# Altium PCB System.PcbDoc
Units mm, origin at the board's own origin, x right, y up, seen from the top; angles counter-clockwise.
Board outline 85 x 56 mm, 4 copper layers (Top Layer, POWER, GND, Bottom Layer), stack 0.778 mm thick; 9 components, 0 nets, 273 pads, 18 vias.
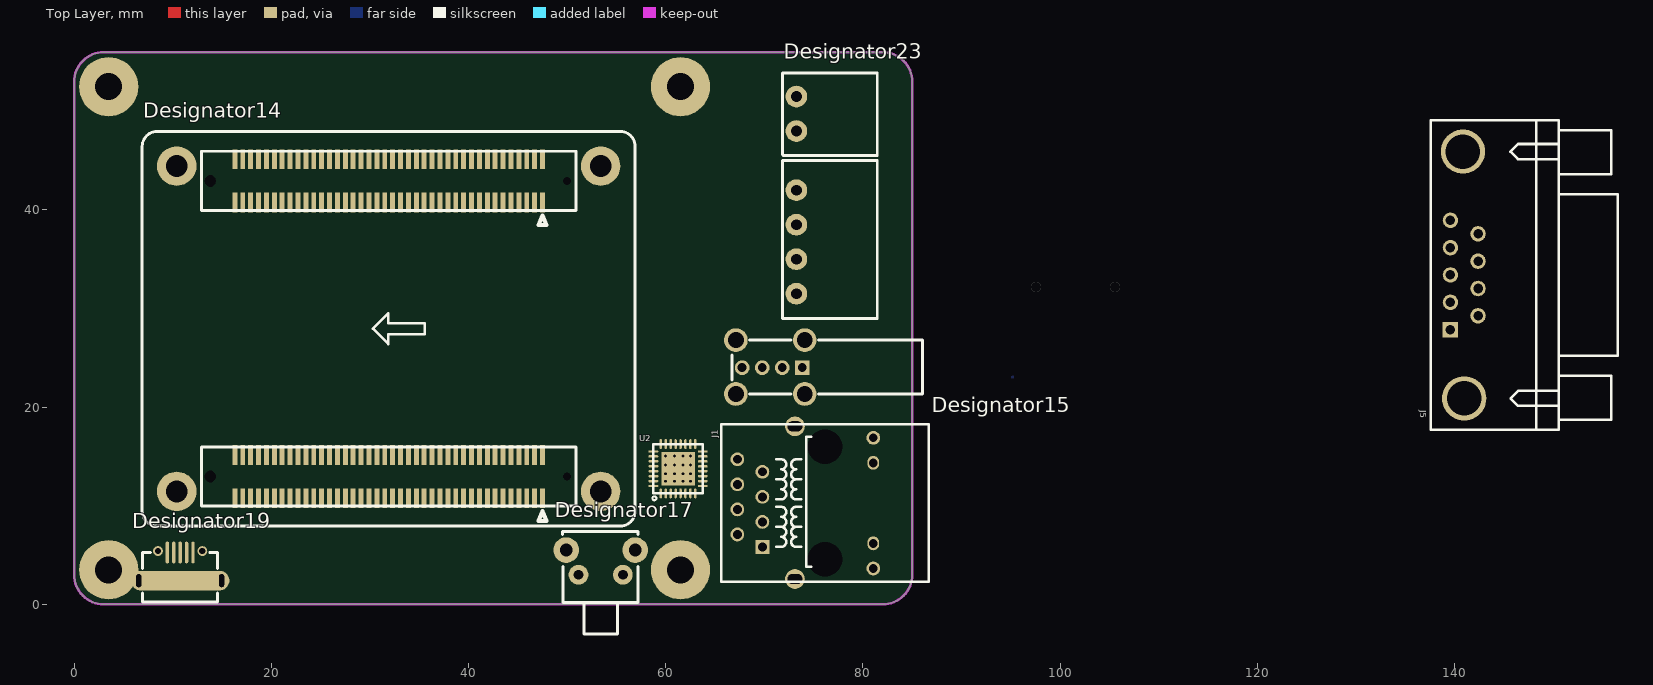
[diagram p0: Top Layer view]
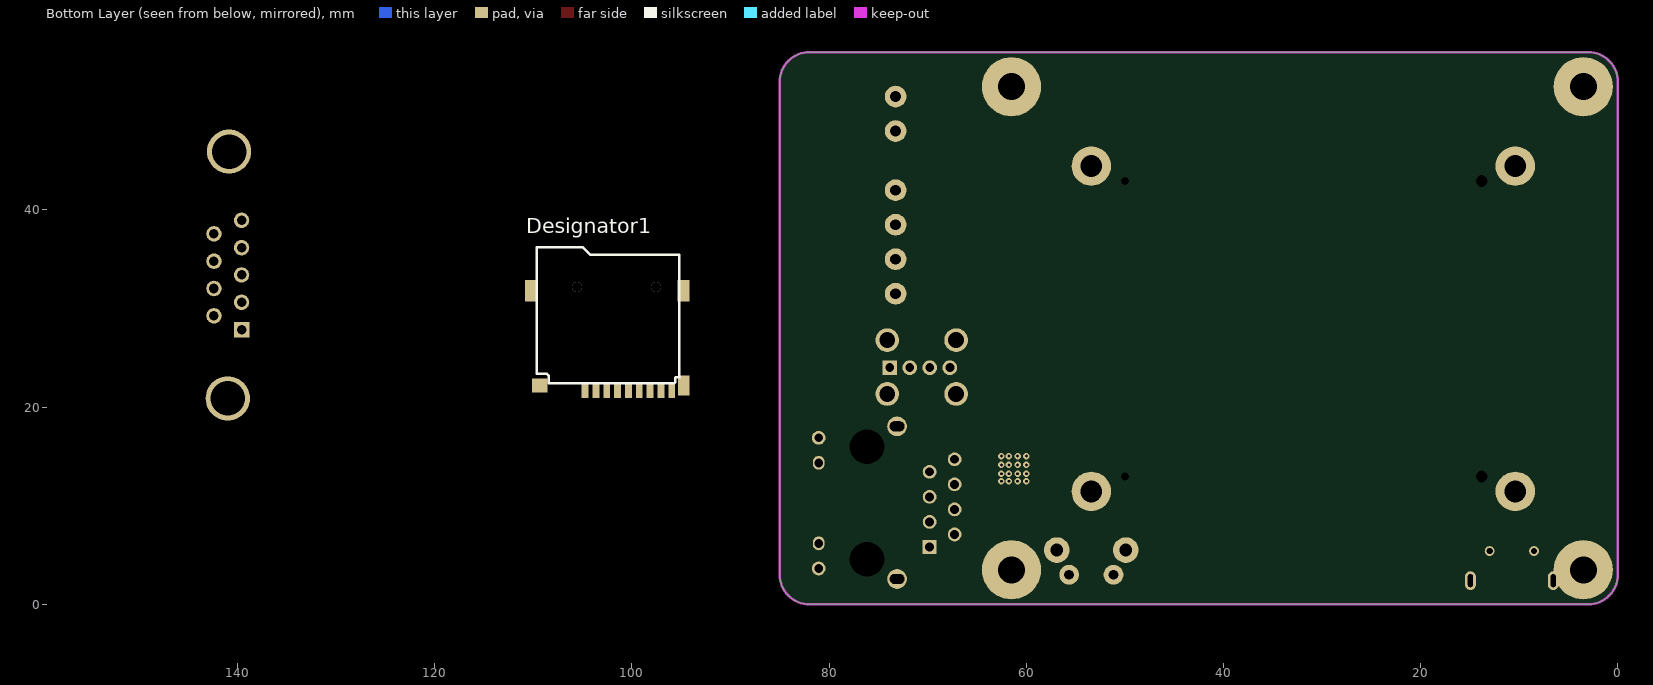
[diagram p1: Bottom Layer view, seen from below]

## Layer stack, top to bottom
Top Solder: solder mask 0.0102, Solder Resist, Dk 3.5
Top Layer: signal copper 0.0356
Dielectric 1: core 0.254, FR-4, Dk 4.2
POWER: signal copper 0.036
Dielectric 3: prepreg 0.127, Dk 4.2
GND: signal copper 0.036
Dielectric 2: core 0.254, Dk 4.2
Bottom Layer: signal copper 0.0356
Bottom Solder: solder mask 0.0102, Solder Resist, Dk 3.5

## Board outline
0,3 0,53 cw(c3,53) 3,56 82,56 cw(c82,53) 85,53 85,3 cw(c82,3) 82,0 3,0 cw(c3,3)

## Design rules (kind name [scope] priority, off if disabled: settings)
Clearance [All] p1: gap=0.254
PolygonConnect [All] p1: connectstyle=Relief reliefconductorwidth=0.254 reliefentries=4 polygonreliefangle="90 Angle" airgapwidth=0.254
RoutingVias [All] p1: holewidth=0.711 width=1.27 viastyle="Through Hole" minholewidth=0.711 minwidth=1.27 maxholewidth=0.711 maxwidth=1.27
SolderMaskExpansion [All] p1: expansion=0.102
Width [All] p1: maxlimit=0.254 minlimit=0.254 preferedwidth=0.254
29 further rules are at their usual default settings.

## Components (designator, comment, footprint, x,y, rotation, side; value= is the part's Value field where it differs from the comment)
Designator1 "Comment" TF 102.5,26.75 r90 bottom
Designator14 "Comment" i.MX6_PCB 47.5,10.75 r90 top
Designator15 "Comment" USB-C 67.75,24 r0 top
Designator17 "Comment" SW4 53.4,3 r0 top
Designator19 "Comment" MICRO_USB 10.75,0.254 r0 top
Designator23 "Comment" WJ15EDGRM 73.25,31.5 r90 top
J1 "HR911105A" RJ-45A12 81.05,3.64 r0 top
J5 "DB9_MALE" DB9R/M 139.586,27.864 r90 top
U2 "KSZ8081" QFN-32 61.25,13.75 r0 top

## Footprints (in the part's own frame and the unit in brackets; to place one, negate y for a bottom-side part, rotate by r counter-clockwise, add the part's x,y. Pads: shape width x height; smd on the part's side, far side on the other; paste and mask are expansions set on the pad)
DB9R/M [mil]
  rect 62x62 hole 38: 1(0,0)
  round 62 hole 38: 2(109,0) 3(218,0) 4(327,0) 5(436,0) 6(55,-110) 7(164,-110) 8(273,-110) 9(382,-110)
  round 177.16 hole 137.79: 10(711,-50) 11(-275,-55)
  silkscreen extent -400,-668 836,79
i.MX6_PCB [mm]
  round 4 hole 2.2: 0(0.7,37.1) 0(0.7,-5.9) 0(33.7,-5.9) 0(33.7,37.1)
  round 1 hole 1.2 unplated: 0(2.2,33.7) 0(32.2,33.7)
  round 0.5 hole 0.8 unplated: 0(2.2,-2.5) 0(32.2,-2.5)
  rect 2x0.5 smd: 1(0,0) 2(4.4,0) 3(0,0.8) 4(4.4,0.8) 5(0,1.6) 6(4.4,1.6) 7(0,2.4) 8(4.4,2.4) 9(0,3.2) 10(4.4,3.2) 11(0,4) 12(4.4,4) 13(0,4.8) 14(4.4,4.8) 15(0,5.6) 16(4.4,5.6) 17(0,6.4) 18(4.4,6.4) 19(0,7.2) 20(4.4,7.2) 21(0,8) 22(4.4,8) 23(0,8.8) 24(4.4,8.8) 25(0,9.6) 26(4.4,9.6) 27(0,10.4) 28(4.4,10.4) 29(0,11.2) 30(4.4,11.2) 31(0,12) 32(4.4,12) 33(0,12.8) 34(4.4,12.8) 35(0,13.6) 36(4.4,13.6) 37(0,14.4) 38(4.4,14.4) 39(0,15.2) 40(4.4,15.2) 41(0,16) 42(4.4,16) 43(0,16.8) 44(4.4,16.8) 45(0,17.6) 46(4.4,17.6) 47(0,18.4) 48(4.4,18.4) 49(0,19.2) 50(4.4,19.2) 51(0,20) 52(4.4,20) 53(0,20.8) 54(4.4,20.8) 55(0,21.6) 56(4.4,21.6) 57(0,22.4) 58(4.4,22.4) 59(0,23.2) 60(4.4,23.2) 61(0,24) 62(4.4,24) 63(0,24.8) 64(4.4,24.8) 65(0,25.6) 66(4.4,25.6) 67(0,26.4) 68(4.4,26.4) 69(0,27.2) 70(4.4,27.2) 71(0,28) 72(4.4,28) 73(0,28.8) 74(4.4,28.8) 75(0,29.6) 76(4.4,29.6) 77(0,30.4) 78(4.4,30.4) 79(0,31.2) 80(4.4,31.2) 81(30,0) 82(34.4,0) 83(30,0.8) 84(34.4,0.8) 85(30,1.6) 86(34.4,1.6) 87(30,2.4) 88(34.4,2.4) 89(30,3.2) 90(34.4,3.2) 91(30,4) 92(34.4,4) 93(30,4.8) 94(34.4,4.8) 95(30,5.6) 96(34.4,5.6) 97(30,6.4) 98(34.4,6.4) 99(30,7.2) 100(34.4,7.2) 101(30,8) 102(34.4,8) 103(30,8.8) 104(34.4,8.8) 105(30,9.6) 106(34.4,9.6) 107(30,10.4) 108(34.4,10.4) 109(30,11.2) 110(34.4,11.2) 111(30,12) 112(34.4,12) 113(30,12.8) 114(34.4,12.8) 115(30,13.6) 116(34.4,13.6) 117(30,14.4) 118(34.4,14.4) 119(30,15.2) 120(34.4,15.2) 121(30,16) 122(34.4,16) 123(30,16.8) 124(34.4,16.8) 125(30,17.6) 126(34.4,17.6) 127(30,18.4) 128(34.4,18.4) 129(30,19.2) 130(34.4,19.2) 131(30,20) 132(34.4,20) 133(30,20.8) 134(34.4,20.8) 135(30,21.6) 136(34.4,21.6) 137(30,22.4) 138(34.4,22.4) 139(30,23.2) 140(34.4,23.2) 141(30,24) 142(34.4,24) 143(30,24.8) 144(34.4,24.8) 145(30,25.6) 146(34.4,25.6) 147(30,26.4) 148(34.4,26.4) 149(30,27.2) 150(34.4,27.2) 151(30,28) 152(34.4,28) 153(30,28.8) 154(34.4,28.8) 155(30,29.6) 156(34.4,29.6) 157(30,30.4) 158(34.4,30.4) 159(30,31.2) 160(34.4,31.2)
  silkscreen extent -2.8,-9.4 37.2,40.6, body extent -0.8,-3.4 35.2,34.6, height 3.75
MICRO_USB [mm]
  oval 0.35x2.2 smd: 1(-1.3,5) 2(-0.65,5) 3(0,5) 4(0.65,5) 5(1.3,5)
  round 1 hole 0.65: 6(-2.25,5.15) 7(2.25,5.15)
  oval 1.1x1.9 hole 0.5 slot 1.3 at 90 deg: 8(-4.2,2.15) 9(4.2,2.15)
  oval 10x2 smd: 10(0,2.15)
  silkscreen extent -3.8,0 3.8,5
QFN-32 [mm]
  oval 0.25x1 smd: 1(-1.75,-2.5) 2(-1.25,-2.5) 3(-0.75,-2.5) 4(-0.25,-2.5) 5(0.25,-2.5) 6(0.75,-2.5) 7(1.25,-2.5) 8(1.75,-2.5) 17(1.75,2.5) 18(1.25,2.5) 19(0.75,2.5) 20(0.25,2.5) 21(-0.25,2.5) 22(-0.75,2.5) 23(-1.25,2.5) 24(-1.75,2.5)
  oval 1x0.25 smd: 9(2.5,-1.75) 10(2.5,-1.25) 11(2.5,-0.75) 12(2.5,-0.25) 13(2.5,0.25) 14(2.5,0.75) 15(2.5,1.25) 16(2.5,1.75) 25(-2.5,1.75) 26(-2.5,1.25) 27(-2.5,0.75) 28(-2.5,0.25) 29(-2.5,-0.25) 30(-2.5,-0.75) 31(-2.5,-1.25) 32(-2.5,-1.75)
  rect 3.4x3.4 smd: 33(0,0)
  silkscreen extent -2.6,-3.2 2.5,2.5
RJ-45A12 [mm]
  rect 1.4x1.4 hole 0.9: 1(-11.25,2.18)
  round 1.4 hole 0.9: 2(-13.79,3.45) 3(-11.25,4.72) 4(-13.79,5.99) 5(-11.25,7.26) 6(-13.79,8.53) 7(-11.25,9.8) 8(-13.79,11.07) 9(0,0) 12(0,13.25)
  oval 1.2x1.4 hole 0.9: 10(0,2.54) 11(0,10.71)
  round 2 hole 1 slot 1.5 at 0 deg: 13(-7.95,14.41) 14(-7.95,-1.07)
  round 0 hole 3.5 unplated: 16(-4.9,0.91) 16(-4.9,12.34)
  silkscreen extent -15.44,-1.38 5.64,14.63
SW4 [mm] "按钮侧立式"
  round 2.6 hole 1.3: 0(-3.5,2.5) 0(3.5,2.5)
  round 2 hole 1: 1(-2.25,0) 2(2.25,0)
  silkscreen extent -3.85,-6 3.8,4.4
TF [mm]
  rect 2.2x1.2 smd: 0(5.05,-7.75) 11(5.05,7.75)
  rect 1.6x0.7 smd: 1(-5.05,2.25) 2(-5.05,1.15) 3(-5.05,0.05) 4(-5.05,-1.05) 5(-5.05,-2.15) 6(-5.05,-3.25) 7(-5.05,-4.35) 8(-5.05,-5.45) 10(-5.05,-6.55)
  rect 2.035x1.149 smd: 9(-4.55,-7.75)
  rect 1.4x1.6 smd: 12(-4.55,6.85)
  Top Layer lines w0.254: -3.738,-7.344 -3.688,-7.293
  silkscreen extent -4.35,-7.34 9.47,7.15, body extent -5.71,-8.07 9.5,8.24, height 1.95
USB-C [mm] "立式USB"
  rect 1.5x1.5 hole 0.9: 1(6.096,0)
  round 1.5 hole 0.9: 2(4.064,0) 3(2.032,0) 4(0,0)
  round 2.4 hole 1.6: 5(6.35,2.794) 6(-0.635,2.794) 7(-0.635,-2.667) 8(6.35,-2.667)
  silkscreen extent -1.02,-2.67 18.29,2.79
WJ15EDGRM [mm]
  round 2.2 hole 1.1: 1(0,0) 2(3.5,0) 3(7,0) 4(10.5,0) 5(16.5,0) 6(20,0)
  silkscreen extent -2.5,-8.2 22.4,1.4

## Part data
J5: library part "D Connector 9", "Receptacle Assembly, 9 Position, Right Angle"
U2: library part KSZ8081RNB

## Free pads (board coordinates)
  round 6 hole 2.75: 0(3.5,3.5) 0(3.5,52.5) 0(61.5,3.5) 0(61.5,52.5)

## Via types
v1: diameter 0.66, hole 0.3, Top Layer to Bottom Layer, 16 vias
v2: diameter 1, hole 1, Top Layer to Bottom Layer, 2 vias

## Nets (pads, with @x,y where several pads share a name; then routed paths per layer and width w, separated by ;. In a path a pad name is that pad's centre, name@x,y a point inside that pad or via, vN(x,y) a via of type N, cw(c..) or ccw(c..) an arc to the next point about the centre after c; other vN are vias at no path point)
pads on no net: Designator1.0 Designator1.1 Designator1.2 Designator1.3 Designator1.4 Designator1.5 Designator1.6 Designator1.7 Designator1.8 Designator1.9 Designator1.10 Designator1.11 Designator1.12 Designator14.0 Designator14.1 Designator14.2 Designator14.3 Designator14.4 Designator14.5 Designator14.6 Designator14.7 Designator14.8 Designator14.9 Designator14.10 Designator14.11 Designator14.12 Designator14.13 Designator14.14 Designator14.15 Designator14.16 Designator14.17 Designator14.18 Designator14.19 Designator14.20 Designator14.21 Designator14.22 Designator14.23 Designator14.24 Designator14.25 Designator14.26 Designator14.27 Designator14.28 Designator14.29 Designator14.30 Designator14.31 Designator14.32 Designator14.33 Designator14.34 Designator14.35 Designator14.36 Designator14.37 Designator14.38 Designator14.39 Designator14.40 Designator14.41 Designator14.42 Designator14.43 Designator14.44 Designator14.45 Designator14.46 Designator14.47 Designator14.48 Designator14.49 Designator14.50 Designator14.51 Designator14.52 Designator14.53 Designator14.54 Designator14.55 Designator14.56 Designator14.57 Designator14.58 Designator14.59 Designator14.60 Designator14.61 Designator14.62 Designator14.63 Designator14.64 Designator14.65 Designator14.66 Designator14.67 Designator14.68 Designator14.69 Designator14.70 Designator14.71 Designator14.72 Designator14.73 Designator14.74 Designator14.75 Designator14.76 Designator14.77 Designator14.78 Designator14.79 Designator14.80 Designator14.81 Designator14.82 Designator14.83 Designator14.84 Designator14.85 Designator14.86 Designator14.87 Designator14.88 Designator14.89 Designator14.90 Designator14.91 Designator14.92 Designator14.93 Designator14.94 Designator14.95 Designator14.96 Designator14.97 Designator14.98 Designator14.99 Designator14.100 Designator14.101 Designator14.102 Designator14.103 Designator14.104 Designator14.105 Designator14.106 Designator14.107 Designator14.108 Designator14.109 Designator14.110 Designator14.111 Designator14.112 Designator14.113 Designator14.114 Designator14.115 Designator14.116 Designator14.117 Designator14.118 Designator14.119 Designator14.120 Designator14.121 Designator14.122 Designator14.123 Designator14.124 Designator14.125 Designator14.126 Designator14.127 Designator14.128 Designator14.129 Designator14.130 Designator14.131 Designator14.132 Designator14.133 Designator14.134 Designator14.135 Designator14.136 Designator14.137 Designator14.138 Designator14.139 Designator14.140 Designator14.141 Designator14.142 Designator14.143 Designator14.144 Designator14.145 Designator14.146 Designator14.147 Designator14.148 Designator14.149 Designator14.150 Designator14.151 Designator14.152 Designator14.153 Designator14.154 Designator14.155 Designator14.156 Designator14.157 Designator14.158 Designator14.159 Designator14.160 Designator15.1 Designator15.2 Designator15.3 Designator15.4 Designator15.5 Designator15.6 Designator15.7 Designator15.8 Designator17.0 Designator17.1 Designator17.2 Designator19.1 Designator19.2 Designator19.3 Designator19.4 Designator19.5 Designator19.6 Designator19.7 Designator19.8 Designator19.9 Designator19.10 Designator23.1 Designator23.2 Designator23.3 Designator23.4 Designator23.5 Designator23.6 J1.1 J1.2 J1.3 J1.4 J1.5 J1.6 J1.7 J1.8 J1.9 J1.10 J1.11 J1.12 J1.13 J1.14 J1.16 J5.1 J5.2 J5.3 J5.4 J5.5 J5.6 J5.7 J5.8 J5.9 J5.10 J5.11 U2.1 U2.2 U2.3 U2.4 U2.5 U2.6 U2.7 U2.8 U2.9 U2.10 U2.11 U2.12 U2.13 U2.14 U2.15 U2.16 U2.17 U2.18 U2.19 U2.20 U2.21 U2.22 U2.23 U2.24 U2.25 U2.26 U2.27 U2.28 U2.29 U2.30 U2.31 U2.32 U2.33
copper on no net:
  other v1: 59.98,12.48 60.869,12.48 61.758,12.48 62.52,12.48 59.98,13.242 60.869,13.242 61.758,13.242 62.52,13.242 59.98,14.131 60.869,14.131 61.758,14.131 62.52,14.131 59.98,15.02 60.869,15.02 61.758,15.02 62.52,15.02
  other v2: 97.55,32.2 105.55,32.2

## Keep-outs
Keep-Out Layer:
  the board outline again, w0.254

## Silkscreen, mask and mechanical layers (free items; w line width, h text height)
Mechanical 1:
  lines w0.254: -2.534,-0.093 0.006,-0.093 ; -1.518,-0.601 0.006,-0.093 ; -1.518,0.415 0.006,-0.093 ; -0.508,54.476 0,56 ; -0.502,1.431 0.006,-0.093 ; -0.254,56 0.254,56 ; -0.248,-0.093 0.26,-0.093 ; 0.002,35.977 0,56 ; 0.004,19.929 0.006,-0.093 ; 0.006,-0.347 0.006,0.161 ; 0.008,-6.996 0.01,-7.504 ; 0.009,-5.254 0.009,-4.746 ; 0.508,54.476 0,56 ; 0.514,1.431 0.006,-0.093 ; 1.531,-6.736 0.009,-7.25 ; 1.533,-5.508 0.009,-5 ; 1.533,-4.492 0.009,-5 ; 1.535,-7.752 0.009,-7.25 ; 8.358,-5 0.009,-5 ; 10.756,-0.347 10.756,0.161 ; 12.28,-0.601 10.756,-0.093 ; 12.28,0.415 10.756,-0.093 ; 13.296,-0.093 10.756,-0.093 ; 20.259,-7.174 0.009,-7.25 ; 24.152,-5 32.5,-5 ; 30.976,-5.508 32.5,-5 ; 30.976,-4.492 32.5,-5 ; 32.5,-5.254 32.5,-4.746 ; 33.26,-7.126 53.509,-7.05 ; 51.983,-6.548 53.509,-7.05 ; 51.987,-7.564 53.509,-7.05 ; 53.508,-6.796 53.51,-7.304 ; 92.092,-1.524 92.6,0 ; 92.092,11.724 92.6,10.2 ; 92.346,0 92.854,0 ; 92.346,10.2 92.854,10.2 ; 92.6,-2.54 92.6,0 ; 92.6,12.74 92.6,10.2 ; 93.108,-1.524 92.6,0 ; 93.108,11.724 92.6,10.2
  lines w0.3: 0.009,-9.109 0.009,2.765 ; 32.5,-5 32.5,6.75 ; 53.509,-2.2 53.509,1.909 ; 53.509,1.5 53.509,6.759 ; 81.9,0 101.9,0
  text "56.093 (mm)" at -0.912,35.723 h1.52 r270.01
  text "10.2 (mm)" at 96.257,-1.019 h1.52 r90
  text "10.75 (mm)" at -1.5,-3.75 h1.52
  text "32.491 (mm)" at 8.612,-5.914 h1.52
  text "53.5 (mm)" at 20.516,-8.087 h1.52 r0.21